# Altium PCB linkit-v4-0.3_6layers.PcbDoc (part 4 of 6)
Units mm, origin at the board's own origin, x right, y up, seen from the top; angles counter-clockwise.
Board outline 70 x 35 mm, 6 copper layers (Top Layer, Int1 (GND), Int2 (Sign), Int3 (Sign), Int4 (PWR), Bottom Layer), stack 1.551 mm thick; 185 components, 156 nets, 761 pads, 1071 vias.
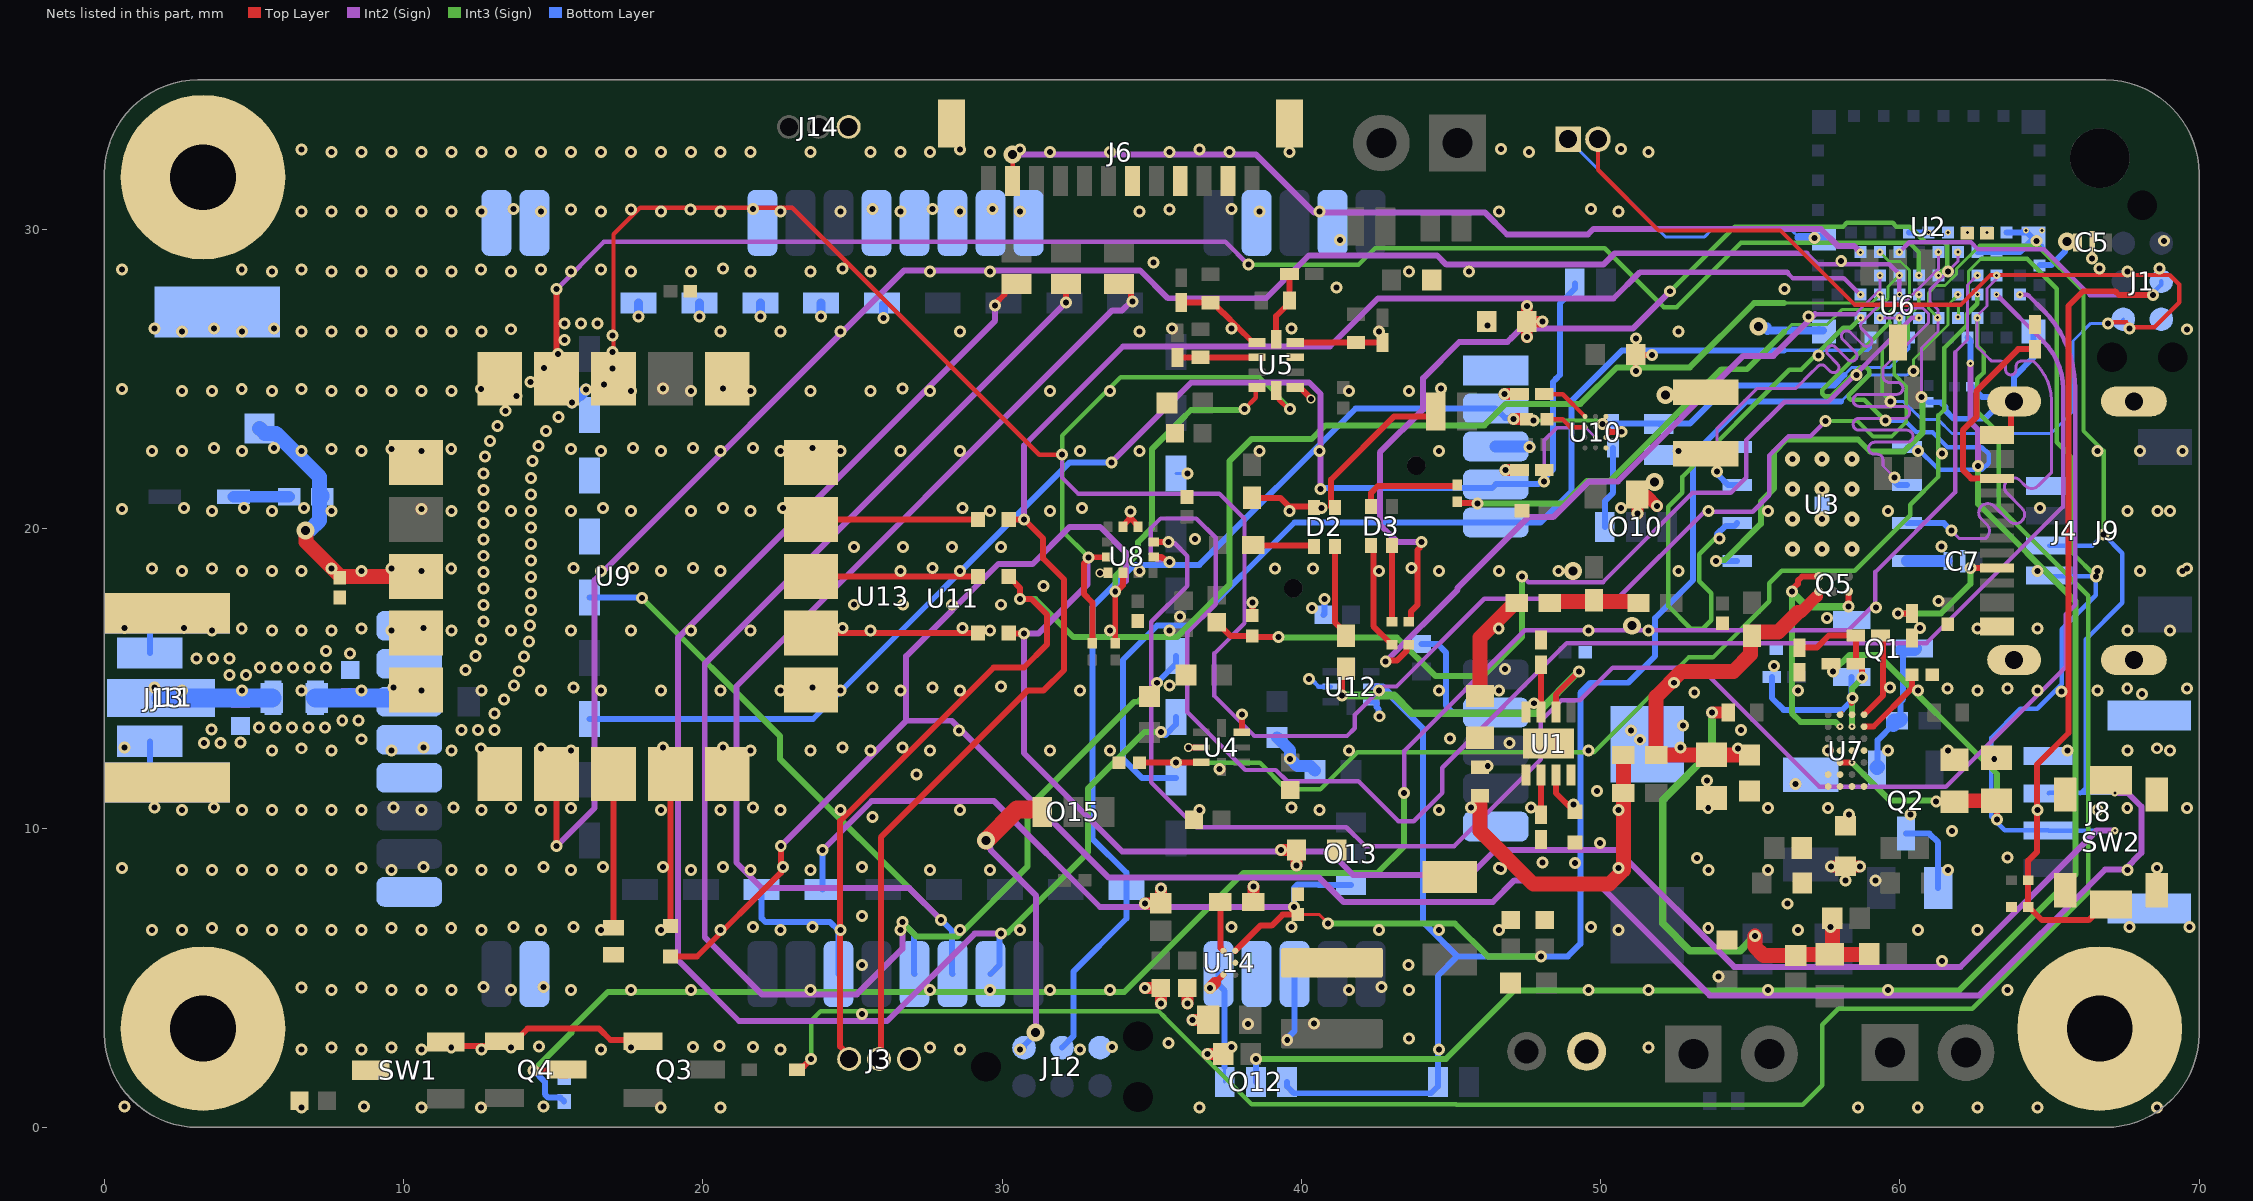
[diagram p7: the nets of this part, all layers, seen from the top]

## Via types
v1: diameter 0.4, hole 0.2, Top Layer to Int1 (GND), tented both sides, 275 vias
v2: diameter 0.4 (per signal layer), hole 0.2, Int1 (GND) to Int2 (Sign), tented both sides, 205 vias
v3: diameter 0.4, hole 0.2, Int1 (GND) to Bottom Layer, tented both sides, 147 vias
v4: diameter 0.4/0.4 (per signal layer), hole 0.2, Int1 (GND) to Int3 (Sign), tented both sides, 103 vias
v5: diameter 0.4, hole 0.2, Int3 (Sign) to Bottom Layer, tented both sides, 48 vias
v6: diameter 0.4, hole 0.2, Top Layer to Int3 (Sign), tented both sides, 46 vias
v7: diameter 0.6, hole 0.3, Top Layer to Int4 (PWR), tented both sides, 38 vias
v8: diameter 0.4/0.4/0.4/0.4 (per signal layer), hole 0.2, Top Layer to Bottom Layer, tented both sides, 33 vias
v9: diameter 0.4, hole 0.2, Int1 (GND) to Int2 (Sign), tented both sides, 23 vias
v10: diameter 0.4, hole 0.2, Int2 (Sign) to Bottom Layer, tented both sides, 20 vias
v11: diameter 0.6, hole 0.3, Int4 (PWR) to Bottom Layer, tented both sides, 19 vias
v12: diameter 0.25, hole 0.1, Int2 (Sign) to Bottom Layer, tented both sides, 17 vias
v13: diameter 0.4, hole 0.2, Top Layer to Int2 (Sign), tented both sides, 16 vias
v14: diameter 0.25, hole 0.1, Int3 (Sign) to Bottom Layer, tented both sides, 14 vias
v15: diameter 0.5, hole 0.2, Top Layer to Bottom Layer, tented both sides, 12 vias
v16: diameter 0.4, hole 0.2, Int2 (Sign) to Int3 (Sign), tented both sides, 10 vias
v17: diameter 0.25, hole 0.1, Top Layer to Bottom Layer, tented both sides, 7 vias
v18: diameter 0.6, hole 0.3, Top Layer to Bottom Layer, tented both sides, 6 vias
v19: diameter 0.4, hole 0.2, Top Layer to Bottom Layer, tented both sides, 5 vias
v20: diameter 0.2, hole 0.1, Int2 (Sign) to Bottom Layer, tented both sides, 5 vias
v21: diameter 0.226, hole 0.1, Top Layer to Int3 (Sign), tented both sides, 5 vias
v22: diameter 0.2, hole 0.1, Int1 (GND) to Bottom Layer, tented both sides, 4 vias
v23: diameter 0.6, hole 0.3, Int1 (GND) to Bottom Layer, tented both sides, 3 vias
v24: diameter 0.3, hole 0.2, Top Layer to Int1 (GND), tented both sides, 3 vias
v25: diameter 0.6, hole 0.3, Int3 (Sign) to Bottom Layer, tented both sides, 2 vias
v26: diameter 0.6, hole 0.3, Top Layer to Int1 (GND), tented both sides, 1 vias
v27: diameter 0.4, hole 0.2, Int4 (PWR) to Bottom Layer, tented both sides, 1 vias
v28: diameter 0.6, hole 0.3, Top Layer to Int2 (Sign), tented both sides, 1 vias
v29: diameter 0.25, hole 0.1, Int1 (GND) to Bottom Layer, tented both sides, 1 vias
v30: diameter 0.169, hole 0.1, Top Layer to Int2 (Sign), tented both sides, 1 vias

## Nets (pads, with @x,y where several pads share a name; then routed paths per layer and width w, separated by ;. In a path a pad name is that pad's centre, name@x,y a point inside that pad or via, vN(x,y) a via of type N, cw(c..) or ccw(c..) an arc to the next point about the centre after c; other vN are vias at no path point) (continued)
GND: BT1.- C1.2 C2.1 C3.1 C4.1 C5.3 C6.1 C7.3 C8.2 C9.1 C10.2 C11.1 C12.1 C13.2 C17.1 C18.1 C19.1 C20.2 C21.2 C22.2 C26.2 C27.2 C30.2 C31.2 C37.1 C38.1 C39.2 C40.1 C43.1 C44.2 C45.2 C46.1 C47.1 C49.1 C50.2 C58.2 FB1.2 FB2.2 FB3.2 FB4.2 FB5.2 J1.5 J2.1 J3.1 J4.A1_B12 J4.B1_A12 J4.SHIELD J5.2 J6.2 J6.4 J6.6 J6.13 J6.14 J8.4 J8.MP1 J8.MP2 J9.1 J11.1 J11.2 J12.5 J13.2 J14.1 MH2.1 MH3.1 MH4.1 O11.1 Q1.2 R6.2 R7.1 R8.1 R10.1 R11.1 R12.1 R18.1 R19.1 R20.1 R21.1 R22.1 R26.1 R33.1 R34.1 R37.2 R39.2 SW1.3 SW2.1 SW2.G1 SW2.G2 SW2.G3 SW2.G4 U1.4 U1.9 U2.1 U2.7 U2.14 U2.16 U2.18 U2.21 U2.23 U2.24 U2.25 U2.31 U3.4 U3.9 U4.3 U4.6 U5.1 U5.3 U6.2 U7.G2 U7.G3 U8.1 U8.8 U8.9 U9.1 U9.4 U9.5 U9.6 U9.10 U9.11 U9.15 U9.16 U9.20 U11.1@46.495,25.294 U11.3@46.495,22.754 U11.7@46.495,13.864 U11.10@46.495,10.054 U11.13@39.775,5.124 U11.14@38.505,5.124 U11.21@24.535,5.124 U11.24@14.375,5.124 U11.26@10.195,7.874 U11.29@10.195,11.684 U11.30@10.195,12.954 U11.32@10.195,15.494 U11.33@10.195,16.764 U11.34@13.105,30.224 U11.35@14.375,30.224 U11.36@21.995,30.224 U11.39@25.805,30.224 U11.42@29.615,30.224 U11.43@30.885,30.224 U11.45@38.505,30.224 U11.47@41.045,30.224 U12.3 U12.6 U13.6 U13.13 U13.14 U13.15 U13.16 U13.17 U13.19 U13.20 U13.21 U13.29 | length 54.1
  Top Layer w0.1: U7.G3@58.001,13.792 U7.G3@58.068,13.859
  Top Layer w0.192: U8.1@33.536,18.529 U8.1@33.54,18.529
  Top Layer w0.2: v24(33.274,18.529) U8.1@33.536,18.529 ; U8.9@34.04,20.079 34.04,20.104 34.252,20.316 34.252,20.536 v1(34.29,20.574) ; 34.328,20.316 34.54,20.104 U8.8@34.54,20.079 ; v24(36.223,12.7) U4.6@36.663,12.7 ; U4.3@38.013,13.2 U4.3@38.013,13.2 38.014,13.805 v1(38.016,13.806) ; R18.1@38.354,17.104 38.361,17.111 38.361,17.532 v1(38.367,17.539) ; U5.1@39.797,24.728 39.935,24.728 39.999,24.664 40.009,24.664 v24(40.327,24.345) ; v1@58.382,14.18 58.382,14.313 v1(58.42,14.351) ; J4.B1_A12@63.243,23.141 63.518,23.141 63.718,23.341 63.718,24.161 J4.SHIELD@63.818,24.261
  Top Layer w0.4: v1(57.692,8.727) FB2.2@58.175,8.727 v1(58.669,8.727)
  Bottom Layer w0.1: U13.13@25.986,27.547 U13.13@26.035,27.498 ; U13.6@35.814,21.844 v3(36.195,21.844) ; J2.1@48.911,33.02 52.17,29.761 53.477,29.761 53.689,29.972 56.387,29.972 56.626,29.733 ; U2.1@57.297,26.762 U2.1@57.46,26.599
  Bottom Layer w0.15: v5@40.366,14.938 40.572,14.732 U12.6@40.981,14.732
  Bottom Layer w0.2: J11.1@1.524,12.902 1.525,12.901 1.525,12.101 J13.2@2.1,11.526 ; J11.2@1.524,15.852 J11.2@1.524,15.852 1.525,16.601 J13.2@2.1,17.176 ; U13.29@21.967,7.947 21.967,6.989 22.098,6.858 24.257,6.858 24.535,6.58 U11.21@24.535,5.124 ; v3(39.529,2.927) 39.529,2.981 39.775,3.226 U11.13@39.775,5.124 ; C46.1@40.736,17.13 40.767,17.161 v3(40.767,17.653) ; U12.3@42.331,14.232 42.481,14.232 42.506,14.207 42.506,14.057 42.578,13.985 42.578,13.777 v3(42.616,13.739) ; C43.1@44.014,16.152 44.554,16.152 44.831,15.875 44.831,14.097 45.064,13.864 U11.7@46.495,13.864 ; U2.14@60.31,29.899 v22(60.96,29.899) ; C3.1@60.96,24.231 61.367,24.231 61.526,24.072 61.526,23.944 61.79,23.68 62.837,23.68 63.418,24.261 J4.SHIELD@63.818,24.261 ; C4.1@62.384,24.752 62.404,24.752 62.742,24.414 63.665,24.414 J4.SHIELD@63.818,24.261 ; U2.21@62.585,29.249 U2.23@63.235,29.249 64.01,29.249 U2.25@64.46,29.699 ; U2.24@63.56,29.899 64.26,29.899 U2.25@64.46,29.699 ; U2.31@64.46,26.599 64.46,25.725 63.818,25.083 J4.SHIELD@63.818,24.261 ; U2.25@64.73,29.429 U2.25@64.46,29.699
  Bottom Layer w0.254: 55.575,26.599 55.412,26.762 v23(55.276,26.762) v23@55.575,26.762 ; 55.575,26.628 U2.1@57.431,26.628
  Bottom Layer w0.3: v3(17.858,27.1) U13.17@17.858,27.547 ; v3(19.89,27.1) U13.16@19.89,27.547 ; v3(21.922,27.1) U13.15@21.922,27.547 ; v3(23.954,27.1) U13.14@23.954,27.547 ; v3(26.035,27.051) U13.13@26.035,27.498 ; 56.626,29.733 57.425,29.733 U2.7@57.46,29.699
  Bottom Layer w0.4: v3(15.638,24.216) 15.638,24.242 15.873,24.477 15.918,24.477 v3(16.105,24.665) ; C45.2@39.188,13.034 39.624,12.598 v3(39.624,12.319) 39.87,12.073 40.308,12.073 C44.2@40.458,11.923 ; U11.3@46.495,22.754 47.604,22.754 v5(47.625,22.733)
  other v1: 6.6,2.6 22.6,2.6 28.6,2.6 30.6,2.6 32.6,2.6 44.6,2.6 14.53,2.704 20.564,2.726 25.322,3.785 11.6,4.6 13.6,4.6 15.6,4.6 17.6,4.6 19.6,4.6 23.6,4.6 27.6,4.6 29.6,4.6 31.6,4.6 33.6,4.6 43.6,4.6 49.6,4.6 55.6,4.6 59.6,4.6 63.6,4.6 25.322,5.422 61.405,5.561 2.6,6.6 4.6,6.6 6.6,6.6 8.6,6.6 10.6,6.6 12.6,6.6 14.6,6.6 22.6,6.6 26.6,6.6 28.6,6.6 30.6,6.6 42.6,6.6 44.6,6.6 50.6,6.6 56.6,6.6 25.322,7.06 58.175,8.255 3.6,8.6 5.6,8.6 7.6,8.6 9.6,8.6 11.6,8.6 13.6,8.6 15.6,8.6 19.6,8.6 21.6,8.6 23.6,8.6 27.6,8.6 53.6,8.6 67.6,8.6 25.322,8.698 49.149,8.835 48.062,8.859 63.594,9.016 49.982,9.503 61.743,9.906 25.676,10.378 6.6,10.6 8.6,10.6 10.6,10.6 22.6,10.6 28.6,10.6 40.6,10.6 44.6,10.6 66.6,10.6 49.874,11.247 27.14,11.788 5.6,12.6 7.6,12.6 9.6,12.6 11.6,12.6 23.6,12.6 25.6,12.6 31.6,12.6 49.6,12.6 69.018,12.6 46.961,12.849 44.961,13 28.563,13.256 51.009,13.269 52.753,13.434 68.093,14.478 53.129,14.534 2.6,14.6 4.6,14.6 6.6,14.6 8.6,14.6 12.6,14.6 14.6,14.6 16.6,14.6 18.6,14.6 20.6,14.6 26.6,14.6 32.6,14.6 42.6,14.6 64.6,14.6 66.6,14.6 29.972,14.732 46.801,15.312 55.798,15.421 5.6,16.6 7.6,16.6 13.6,16.6 15.6,16.6 17.6,16.6 19.6,16.6 21.6,16.6 49.6,16.6 51.6,16.6 67.6,16.6 69.018,16.6 57.566,17.027 40.36,17.355 59.195,17.378 25.058,17.465 26.696,17.465 28.334,17.465 29.972,17.465 31.387,18.094 2.6,18.6 4.6,18.6 6.6,18.6 16.6,18.6 18.6,18.6 20.6,18.6 44.6,18.6 48.6,18.6 52.6,18.6 64.6,18.6 66.6,18.6 69.436,18.6 39.123,18.676 40.393,18.676 25.058,19.399 26.696,19.399 28.334,19.399 29.972,19.399 3.6,20.6 5.6,20.6 7.6,20.6 13.6,20.6 15.6,20.6 17.6,20.6 19.6,20.6 21.6,20.6 31.6,20.6 53.6,20.6 55.6,20.6 67.6,20.6 69.018,20.6 61.403,22.52 2.6,22.6 4.6,22.6 6.6,22.6 8.6,22.6 16.6,22.6 18.6,22.6 20.6,22.6 26.6,22.6 28.6,22.6 34.6,22.6 40.6,22.6 44.6,22.6 66.6,22.6 69.436,22.6 3.6,24.6 5.6,24.6 7.6,24.6 9.6,24.6 11.6,24.6 23.6,24.6 25.6,24.6 27.6,24.6 31.6,24.6 33.6,24.6 43.6,24.6 58.547,25.146 57.284,25.788 2.6,26.6 4.6,26.6 6.6,26.6 8.6,26.6 10.6,26.6 12.6,26.6 20.6,26.6 22.6,26.6 24.6,26.6 28.6,26.6 52.6,26.6 56.948,27.093 56.147,28.01 5.6,28.6 7.6,28.6 9.6,28.6 11.6,28.6 13.6,28.6 15.6,28.6 17.6,28.6 21.6,28.6 23.6,28.6 27.6,28.6 29.6,28.6 45.6,28.6 61.6,28.6 58.04,28.951 66.422,29.038 64.564,29.627 68.819,29.627 57.151,29.715 6.6,30.6 8.6,30.6 10.6,30.6 12.6,30.6 14.6,30.6 16.6,30.6 24.6,30.6 26.6,30.6 38.6,30.6 40.6,30.6 46.6,30.6 7.6,32.6 9.6,32.6 11.6,32.6 13.6,32.6 15.6,32.6 17.6,32.6 19.6,32.6 21.6,32.6 31.6,32.6 33.6,32.6 35.6,32.6 37.6,32.6 47.6,32.6
  other v2: 8.6,2.6 10.6,2.6 12.6,2.6 16.6,2.6 22.6,2.6 28.6,2.6 30.6,2.6 32.6,2.6 11.6,4.6 13.6,4.6 15.6,4.6 29.6,4.6 31.6,4.6 41.6,4.6 43.6,4.6 49.6,4.6 51.6,4.6 4.6,6.6 6.6,6.6 8.6,6.6 10.6,6.6 12.6,6.6 14.6,6.6 16.6,6.6 18.6,6.6 20.6,6.6 22.6,6.6 24.6,6.6 30.6,6.6 42.6,6.6 44.6,6.6 46.6,6.6 50.6,6.6 60.6,6.6 62.6,6.6 3.6,8.6 5.6,8.6 7.6,8.6 9.6,8.6 11.6,8.6 13.6,8.6 15.6,8.6 23.6,8.6 27.6,8.6 29.6,8.6 55.6,8.6 61.6,8.6 2.6,10.6 4.6,10.6 6.6,10.6 8.6,10.6 10.6,10.6 12.6,10.6 14.6,10.6 18.6,10.6 20.6,10.6 22.6,10.6 24.6,10.6 36.6,10.6 40.6,10.6 50.6,10.6 64.6,10.6 9.6,12.6 15.6,12.6 21.6,12.6 23.6,12.6 27.6,12.6 31.6,12.6 33.6,12.6 41.6,12.6 57.6,12.6 59.6,12.6 61.6,12.6 65.6,12.6 2.6,14.6 8.6,14.6 10.6,14.6 14.6,14.6 18.6,14.6 20.6,14.6 22.6,14.6 24.6,14.6 28.6,14.6 32.6,14.6 44.6,14.6 46.6,14.6 56.6,14.6 60.6,14.6 62.6,14.6 3.6,16.6 5.6,16.6 9.6,16.6 11.6,16.6 15.6,16.6 17.6,16.6 25.6,16.6 29.6,16.6 33.6,16.6 35.6,16.6 2.6,18.6 4.6,18.6 6.6,18.6 8.6,18.6 10.6,18.6 18.6,18.6 20.6,18.6 26.6,18.6 28.6,18.6 34.6,18.6 42.6,18.6 46.6,18.6 52.6,18.6 64.6,18.6 3.6,20.6 5.6,20.6 7.6,20.6 11.6,20.6 15.6,20.6 17.6,20.6 19.6,20.6 21.6,20.6 29.6,20.6 31.6,20.6 39.6,20.6 59.6,20.6 67.6,20.6 2.6,22.6 4.6,22.6 6.6,22.6 8.6,22.6 10.6,22.6 16.6,22.6 18.6,22.6 22.6,22.6 24.6,22.6 32.6,22.6 38.6,22.6 44.6,22.6 52.6,22.6 60.6,22.6 3.6,24.6 5.6,24.6 7.6,24.6 9.6,24.6 11.6,24.6 17.6,24.6 19.6,24.6 21.6,24.6 23.6,24.6 25.6,24.6 33.6,24.6 41.6,24.6 43.6,24.6 2.6,26.6 4.6,26.6 6.6,26.6 8.6,26.6 10.6,26.6 12.6,26.6 28.6,26.6 34.6,26.6 42.6,26.6 5.6,28.6 7.6,28.6 9.6,28.6 11.6,28.6 13.6,28.6 17.6,28.6 19.6,28.6 21.6,28.6 23.6,28.6 25.6,28.6 43.6,28.6 67.6,28.6 6.6,30.6 8.6,30.6 10.6,30.6 12.6,30.6 14.6,30.6 16.6,30.6 18.6,30.6 20.6,30.6 22.6,30.6 24.6,30.6 26.6,30.6 28.6,30.6 30.6,30.6 34.6,30.6 38.6,30.6 50.6,30.6 7.6,32.6 9.6,32.6 11.6,32.6 13.6,32.6 15.6,32.6 17.6,32.6 19.6,32.6 21.6,32.6 23.6,32.6 25.6,32.6 27.6,32.6 29.6,32.6 39.6,32.6 47.6,32.6 51.6,32.6
  other v3: 6.596,0.67 10.596,0.67 12.596,0.67 18.596,0.67 36.596,0.67 58.596,0.67 60.596,0.67 62.596,0.67 7.596,2.67 9.596,2.67 11.596,2.67 51.596,2.67 35.557,2.816 43.6,2.968 38.216,3.456 40.417,3.476 6.596,4.67 8.596,4.67 43.577,5.429 9.596,6.67 11.596,6.67 0.596,8.67 15.596,10.67 55.596,10.67 69.596,10.67 14.596,12.67 3.328,12.852 3.878,12.852 4.555,12.856 8.6,12.971 11.935,13.278 12.485,13.278 13.035,13.278 3.588,13.303 5.17,13.363 5.72,13.363 6.27,13.363 6.82,13.363 7.37,13.363 7.954,13.591 8.504,13.591 13.035,13.828 13.363,14.297 61.596,14.67 13.692,14.767 4.191,15.113 4.741,15.113 13.865,15.243 12.078,15.282 5.207,15.367 5.757,15.367 6.307,15.367 6.857,15.367 7.407,15.367 3.091,15.663 3.641,15.663 4.191,15.663 12.407,15.752 14.027,15.741 8.221,15.838 7.407,15.917 14.19,16.24 12.594,16.305 4.596,16.67 8.596,16.67 62.596,16.67 14.228,16.768 12.672,16.902 14.265,17.296 12.672,17.452 14.265,17.846 12.672,18.002 14.265,18.396 12.672,18.552 1.596,18.67 3.596,18.67 7.596,18.67 9.596,18.67 11.596,18.67 14.265,18.946 12.672,19.102 14.265,19.496 12.672,19.652 14.265,20.046 12.672,20.202 14.265,20.596 0.596,20.67 10.596,20.67 12.672,20.752 14.265,21.146 12.672,21.302 14.265,21.696 12.672,21.852 14.314,22.264 12.721,22.42 7.596,22.67 9.596,22.67 11.596,22.67 15.596,22.67 14.504,22.772 12.886,22.943 14.763,23.273 13.146,23.445 15.178,23.746 13.406,23.947 13.777,24.44 0.596,24.67 4.596,24.67 6.596,24.67 12.596,24.67 16.7,24.831 14.237,24.91 16.983,25.356 14.698,25.379 15.159,25.849 16.983,25.906 15.376,26.307 16.983,26.456 13.596,26.67 69.596,26.67 46.228,26.797 15.376,26.857 15.926,26.857 16.476,26.857 0.596,28.67 6.596,28.67 12.596,28.67 14.596,28.67 16.596,28.67 15.596,30.67 17.596,30.67 19.596,30.67 35.596,30.67 6.596,32.67 28.596,32.67
  other v4: 0.674,0.695 8.674,0.695 14.674,0.695 19.674,2.695 21.674,2.695 33.674,2.695 37.674,2.695 12.674,4.695 14.674,4.695 42.674,4.695 13.674,6.695 15.674,6.695 21.674,6.695 23.674,6.695 37.674,6.695 39.674,6.695 49.674,6.695 57.674,6.695 67.674,6.695 69.674,6.695 10.674,8.695 14.674,8.695 16.674,8.695 18.674,8.695 20.674,8.695 22.674,8.695 1.674,10.695 3.674,10.695 9.674,10.695 11.674,10.695 21.674,10.695 39.674,10.695 45.674,10.695 47.674,10.695 0.674,12.695 10.674,12.695 18.674,12.695 20.674,12.695 24.674,12.695 26.674,12.695 52.674,12.695 1.674,14.695 9.674,14.695 15.674,14.695 23.674,14.695 25.674,14.695 27.674,14.695 59.674,14.695 0.674,16.695 2.674,16.695 10.674,16.695 24.674,16.695 28.674,16.695 60.674,16.695 15.674,18.695 17.674,18.695 19.674,18.695 27.674,18.695 43.674,18.695 2.674,20.695 4.674,20.695 6.674,20.695 16.674,20.695 20.674,20.695 22.674,20.695 28.674,20.695 32.674,20.695 40.674,20.695 50.674,20.695 64.674,20.695 3.674,22.695 5.674,22.695 17.674,22.695 19.674,22.695 21.674,22.695 23.674,22.695 18.674,24.695 20.674,24.695 26.674,24.695 44.674,24.695 1.674,26.695 3.674,26.695 5.674,26.695 35.674,26.695 37.674,26.695 39.674,26.695 67.674,26.695 41.179,28.061 20.674,28.695 24.674,28.695 66.674,28.695 68.674,28.695 35.064,28.905 41.291,29.659 13.674,30.695 21.674,30.695 25.674,30.695 27.674,30.695 29.674,30.695 37.674,30.695 49.674,30.695 46.674,32.695 50.674,32.695
  other v5: 20.596,0.67 64.596,0.67 68.596,0.67 13.596,2.67 17.596,2.67 27.596,2.67 3.596,6.67 53.596,6.67 8.596,8.67 46.596,8.67 50.596,8.67 68.596,8.67 13.596,10.67 53.596,10.67 57.596,10.67 67.596,10.67 6.596,12.67 12.596,12.67 54.596,12.67 68.596,12.67 63.596,14.67 67.596,14.67 69.596,14.67 40.259,14.986 46.596,16.67 64.596,16.67 69.596,18.67 4.596,28.67 30.596,32.67 36.596,32.67
  other v6: 7.6,4.6 9.6,4.6 68.018,18.6 68.018,22.6
  other v8: 10.6,4.6 1.6,6.6 5.6,6.6 7.6,6.6 2.6,8.6 4.6,8.6 6.6,8.6 12.6,8.6 5.6,10.6 7.6,10.6 6.6,16.6 5.6,18.6 68.6,20.6 1.6,22.6 2.6,24.6 8.6,24.6 10.6,24.6 7.6,26.6 9.6,26.6 11.6,26.6 8.6,28.6 10.6,28.6 7.6,30.6 9.6,30.6 11.6,30.6 8.6,32.6 10.6,32.6 12.6,32.6 14.6,32.6 16.6,32.6 18.6,32.6 20.6,32.6 26.6,32.6
  other v9: 53.941,5.043 56.243,7.475 59.182,8.255 46.672,8.631 53.22,9.001 58.305,10.45 60.356,10.45 49.086,10.785 56.511,11.473 53.552,11.599 37.273,11.976 46.229,12.071 63.152,12.316 51.308,12.954 54.687,13.282 47.77,14.174 65.405,14.569 35.589,14.775 52.451,14.859 35.953,17.067 61.284,17.596 61.389,19.407 36.451,19.66
  other v15: 56.404,19.328 57.404,19.328 58.404,19.328 56.404,20.328 57.404,20.328 58.404,20.328 56.404,21.328 57.404,21.328 58.404,21.328 56.404,22.328 57.404,22.328 58.404,22.328
  other v19: 67.6,12.6
  other v22: 61.61,29.899 64.22,29.965 64.754,29.972
  other v23: 51.795,21.565 52.166,24.476
  other v25: 51.054,16.764 49.073,18.599
GPIO: J6.11 U2.9 | length 30.7
  Top Layer w0.146: v28(30.353,32.512) J6.11@30.354,31.623 J6.11@30.354,31.623
  Int2 (Sign) w0.2: v28(30.353,32.512) 38.481,32.512 40.416,30.577 46.131,30.577 46.873,29.835 49.572,29.835 49.756,30.02 57.356,30.02 57.92,29.456 58.465,29.456 v12(58.681,29.24)
GPS_INT: U2.61 U9.19 | length 52.3
  Top Layer w0.2: U9.19@15.118,25.015 v13(15.118,28.01)
  Int2 (Sign) w0.15: v13(15.118,28.01) 16.699,29.591 37.465,29.591 v16(38.227,28.829)
  Int3 (Sign) w0.15: v16(38.227,28.829) 41.91,28.829 42.462,29.381 50.135,29.381 51.795,27.721 52.105,27.411 52.543,27.411 53.633,28.501 54.691,29.558 60.322,29.558 60.635,29.246 v12(60.635,28.474)
GPS_NRST: U2.53 U9.18 | length 71.6
  Top Layer w0.146: U9.18@17.018,25.015 17.018,29.845 17.907,30.734 22.987,30.734 31.242,22.479 v13(32.004,22.479)
  Int2 (Sign) w0.146: v13(32.004,22.479) 32.004,21.717 32.541,21.18 37.256,21.18 38.1,20.335 38.1,16.846 37.095,15.84 37.095,14.417 38.432,13.079 41.527,13.079 41.783,13.335 41.783,13.783 42.732,14.732 43.18,14.732 46.11,17.662 50.555,17.662 53.467,20.574 55.08,20.574 55.633,21.127 55.633,22.452 56.276,23.095 57.009,23.095 v16(57.519,23.605)
  Int3 (Sign) w0.12: v16(57.519,23.605) 57.946,23.605 58.585,23.605 59.103,23.087 59.724,23.087 60.208,23.571 60.208,24.764 59.817,25.155 59.817,25.754 60.283,26.22 60.283,27.118 60.635,27.47 v14(60.635,27.824)
GPS_PPS: U2.54 U9.7 | length 62
  Top Layer w0.2: v13(15.113,9.398) 15.113,11.81 U9.7@15.118,11.815
  Int2 (Sign) w0.15: 56.876,29.21 57.24,28.846 59.645,28.846 59.985,28.507 v20(59.985,27.824)
  Int2 (Sign) w0.2: v13(15.113,9.398) 16.383,10.668 16.383,18.288 26.732,28.637 34.609,28.637 35.54,27.706 38.821,27.706 40.25,29.136 44.536,29.136 44.843,28.829 48.706,28.829 50.09,28.829 50.471,29.21 56.876,29.21
GPS_PWR_EN: R21.2 U2.50 U4.7 | length 39.4
  Top Layer w0.2: R21.2@34.589,12.192 v6(35.814,12.192) 35.818,12.196 36.659,12.196 U4.7@36.663,12.2
  Int3 (Sign) w0.15: v6(35.814,12.192) 38.608,12.192 39.497,11.303 40.64,11.303 41.868,12.531 49.765,12.531 52.938,15.704 53.755,15.704 55.638,17.587 55.638,18.187 56.05,18.599 58.494,18.599 60.346,20.451 60.346,20.805 61.289,21.749 61.289,23.789 61.489,23.989 61.489,26.052 62.235,26.798 62.235,27.175 62.585,27.525 v20(62.585,27.824)
GPS_UART_RX: J3.2 R40.2 U2.56 | length 55.1
  Top Layer w0.2: J3.2@25.892,2.286 25.951,2.345 25.951,9.695 30.861,14.605 31.392,14.605 32.069,15.282 32.069,18.315 31.369,19.014 31.369,19.685 v13(30.734,20.32) R40.2@30.226,20.32
  Int2 (Sign) w0.15: 56.22,28.575 56.413,28.382 58.127,28.382 v12(58.685,27.824)
  Int2 (Sign) w0.2: v13(30.734,20.32) 30.734,22.787 34.042,26.094 40.953,26.094 42.557,27.698 48.706,27.698 50.431,27.698 51.308,28.575 56.22,28.575
GPS_UART_TX: J3.3 R42.2 U2.55 | length 56.7
  Top Layer w0.2: J3.3@24.892,2.286 24.892,2.403 24.592,2.703 24.592,10.241 29.718,15.367 30.734,15.367 31.496,16.129 31.496,17.145 30.988,17.653 v6(30.607,17.653) 30.607,18.022 R42.2@30.335,18.294
  Int3 (Sign) w0.1: 56.134,27.549 59.06,27.549 v14(59.335,27.824)
  Int3 (Sign) w0.2: v6(30.607,17.653) 31.117,17.653 32.388,16.382 35.835,16.382 37.592,18.14 37.592,22.262 38.33,23 40.34,23 40.803,23.462 46.118,23.462 46.832,24.176 49.322,24.176 50.546,25.4 52.982,25.4 55.131,27.549 56.134,27.549
I2C_SCL: J8.2 J9.4 R1.1 R43.2 U2.37 U5.10 U8.12 | length 99.1
  Top Layer w0.15: R43.2@30.226,16.515 R43.2@30.231,16.51 ; v6(32.893,19.05) v6@32.895,19.052 ; U8.12@33.513,19.052 U8.12@33.515,19.054 ; U5.10@39.159,24.618 39.159,24.463 39.244,24.378 39.244,24.315 39.556,24.003 v6(39.624,24.003)
  Top Layer w0.2: R43.2@30.231,16.51 v13(30.734,16.51) ; v6(32.893,19.05) 32.893,18.996 32.734,18.836 32.734,17.828 33.02,17.542 R1.1@33.02,16.181 ; v6@32.895,19.052 U8.12@33.513,19.052
  Int2 (Sign) w0.2: v6(32.893,19.05) 32.849,19.006 32.849,18.135 31.224,16.51 v13(30.734,16.51) 30.734,12.504 34.016,9.222 40.943,9.222 41.73,8.435 45.646,8.435 46.482,9.271 50.558,9.271 54.462,5.368 62.025,5.368 66.574,9.916 v12(67.183,9.916)
  Int3 (Sign) w0.1: v20@61.954,27.093 61.954,27.419 62.285,27.749 62.285,28.598 62.71,29.023
  Int3 (Sign) w0.15: v6(32.893,19.05) 32.004,19.939 32.004,23.114 33.964,25.074 38.592,25.074 39.624,24.042 v6(39.624,24.003) ; v20(61.935,27.074) v20@61.954,27.093 ; 62.71,29.023 64.248,29.023 65.242,28.029 65.242,22.895 65.786,22.351 65.786,19.177 v5(66.548,18.415)
  Bottom Layer w0.15: J9.4@64.987,18.439 65.011,18.415 v5(66.548,18.415) 66.548,17.78 65.41,16.642 65.41,14.809 64.588,13.987 64.025,13.987 63.053,13.015 63.053,10.388 63.507,9.935 64.96,9.935 J8.2@64.979,9.916 v12(67.183,9.916)
I2C_SDA: J8.3 J9.3 R2.1 R44.1 U2.39 U5.9 U8.2 | length 116.9
  Top Layer w0.15: v6(38.1,24.003) 38.481,24.384 38.481,24.653 38.521,24.693 U5.9@38.521,24.728
  Top Layer w0.2: R44.1@18.918,5.71 19.807,5.71 22.606,8.509 v13(22.606,9.398) ; R2.1@33.782,16.181 v6(33.782,17.907) 33.83,17.907 34.04,18.117 U8.2@34.04,18.529
  Int2 (Sign) w0.2: v13(22.606,9.398) 26.797,13.589 ; v6(33.782,17.907) 33.782,17.91 34.134,18.262 34.134,19.206 33.274,20.066 32.258,20.066 31.02,18.828 29.877,18.828 26.797,15.748 26.797,13.589 ; v12(67.183,11.176) 67.616,11.176 68.069,10.722 68.069,9.174 67.507,8.612 66.854,8.612 62.655,4.413 53.643,4.413 49.801,8.255 47.117,8.255 46.403,7.541 41.403,7.541 40.595,8.348 33.562,8.348 28.321,13.589 26.797,13.589
  Int3 (Sign) w0.1: v14(61.261,27.06) 60.96,27.361 60.96,27.888 61.208,28.136 61.508,28.136 61.884,28.512 61.884,28.684 62.664,29.464
  Int3 (Sign) w0.15: 62.664,29.464 64.603,29.464 66.135,27.932 66.135,25.745 66.135,23.273 66.805,22.603 v5(66.805,19.816)
  Int3 (Sign) w0.2: v6(33.782,17.907) 33.782,18.415 34.548,19.181 34.548,19.562 35.006,20.02 35.006,22.662 35.988,23.644 36.315,23.971 38.068,23.971 v6(38.1,24.003)
  Bottom Layer w0.15: J8.3@64.979,11.166 64.989,11.176 66.04,11.176 ; J9.3@64.987,19.439 64.995,19.431 66.42,19.431 v5(66.805,19.816) 67.431,19.19 67.431,17.527 66.216,16.312 66.216,11.352 66.04,11.176 ; 66.03,11.166 66.04,11.176 ; v12(67.183,11.176) 66.04,11.176
IMU_PWR: R18.2 R31.1 U2.41 | length 31.2
  Top Layer w0.1: R18.2@38.354,16.424 R18.2@38.395,16.383
  Top Layer w0.2: R31.1@37.173,16.878 37.627,16.424 R18.2@38.354,16.424 ; R18.2@38.395,16.383 v6(39.243,16.383)
  Int2 (Sign) w0.15: v16(47.371,18.415) 47.393,18.415 47.584,18.224 50.08,18.224 53.056,21.2 54.347,21.2 54.864,21.717 54.864,22.97 56.147,24.253 57.601,24.253 60.397,27.049 v12(60.635,27.049)
  Int3 (Sign) w0.2: v6(39.243,16.383) 39.26,16.366 43.197,16.366 44.475,15.088 46.076,15.088 47.371,16.383 v16(47.371,18.415)
INT1_IMU: U2.49 U8.5 | length 54.5
  Top Layer w0.2: U8.5@35.065,19.054 35.321,19.054 v6(35.599,18.901)
  Int2 (Sign) w0.15: v6(35.599,18.901) 35.551,18.949 35.187,18.949 34.975,19.161 34.975,20.027 35.295,20.347 36.489,20.347 37.137,19.699 37.137,17.478 36.195,16.536 36.195,13.878 38.129,11.943 39.147,11.943 39.528,11.563 41.908,11.563 43.244,10.227 43.755,10.227 44.704,11.176 44.704,12.023 48.866,16.185 60.889,16.185 65.451,20.747 65.451,24.682 65.451,24.684 ccw(c63.22,24.684) 65.403,25.146 ccw(c63.22,24.684) 64.797,26.262 v20(63.235,27.824)
INT2_IMU: U2.29 U8.6 | length 60.7
  Top Layer w0.2: U8.6@35.065,19.554 v13(35.56,19.554)
  Int2 (Sign) w0.15: v13(35.56,19.554) 35.598,19.516 35.768,19.516 36.195,19.089 36.195,18.102 34.987,16.894 34.987,11.527 36.481,10.034 41.505,10.034 42.142,9.397 45.104,9.397 48.006,12.299 48.006,13.589 48.683,14.266 49.303,14.266 50.403,15.366 53.331,15.366 57.313,11.385 61.539,11.385 65.549,15.395 65.549,17.152 65.855,17.458 65.855,24.727 65.855,24.728 ccw(c62.201,24.727) 65.831,25.146 ccw(c62.201,24.727) 64.794,27.302 ; v12(64.01,27.824) 64.21,27.824 cw(c64.21,27.674) 64.316,27.78 64.793,27.302
KIM_I2C_SCL: U11.41@28.345,30.224
KIM_I2C_SDA: U11.40@27.075,30.224
KIM_PWR_ON: O12.2 U2.36 | length 50.1
  Int2 (Sign) w0.2: v12(62.357,25.527) 62.357,23.564 62.611,23.31 v16(62.611,22.098)
  Int3 (Sign) w0.2: v5(38.481,2.286) 44.831,2.286 47.124,4.579 61.983,4.579 65.859,8.455 65.859,17.587 62.611,20.835 v16(62.611,22.098)
  Bottom Layer w0.2: O12.2@38.481,1.524 v5(38.481,2.286) ; U2.36@62.26,26.399 62.357,26.302 v12(62.357,25.527)
KIM_RX: O2.1 U11.19@27.075,5.124 U13.3 | length 52.2
  Top Layer w0.2: v13(32.131,27.559) O2.1@32.131,28.181
  Int2 (Sign) w0.2: v10(26.67,6.858) 26.67,5.969 25.146,4.445 21.971,4.445 20.066,6.35 20.066,15.494 v13(32.131,27.559)
  Int3 (Sign) w0.2: v10(26.67,6.858) 27.151,6.377 28.511,6.377 30.858,8.724 30.858,10.665 34.417,14.224 34.544,14.224 v5(35.179,14.859)
  Bottom Layer w0.2: v10(26.67,6.858) 27.063,6.465 27.063,5.136 U11.19@27.075,5.124 ; v5(35.179,14.859) 35.179,14.863 35.814,15.498 U13.3@35.814,15.748
KIM_TX: O3.1 U11.18@28.345,5.124 U13.22 | length 51.6
  Top Layer w0.2: O3.1@33.909,28.181 34.079,28.181 34.309,27.951 34.309,27.705 34.363,27.651 v13(34.363,27.597)
  Int2 (Sign) w0.2: v10(27.965,6.931) 26.903,7.993 21.979,7.993 21.126,8.846 21.126,14.741 33.685,27.3 34.012,27.3 34.309,27.597 v13(34.363,27.597)
  Int3 (Sign) w0.2: v10(17.97,17.691) 22.578,13.083 22.578,12.318 v10(27.965,6.931)
  Bottom Layer w0.2: U13.22@16.214,17.714 17.947,17.714 v10(17.97,17.691) ; v10(27.965,6.931) 28.333,6.563 28.333,5.136 U11.18@28.345,5.124
LED_B: R24.1 U2.63 | length 23.3
  Top Layer w0.2: v13(42.82,15.569) 42.858,15.607 43.199,15.607 43.507,15.915 43.507,16.069 43.567,16.129 R24.1@43.587,16.129
  Int2 (Sign) w0.1: 58.516,27.178 59.335,27.997 v12(59.335,28.474)
  Int2 (Sign) w0.15: 57.17,27.178 58.516,27.178
  Int2 (Sign) w0.2: v13(42.82,15.569) 45.22,17.969 45.22,18.03 47.582,20.391 48.416,20.391 49.614,21.59 50.58,21.59 54.771,25.781 55.773,25.781 57.17,27.178
LED_G: R25.1 U2.60 | length 31.1
  Top Layer w0.2: R25.1@43.587,16.891 43.607,16.891 43.667,16.951 43.667,17.244 43.874,17.451 43.874,19.293 43.969,19.389 43.969,19.527 v13(44.008,19.565)
  Int2 (Sign) w0.2: v13(44.008,19.565) 43.203,19.565 42.622,20.146 42.622,22.556 44.069,24.003 44.069,25.036 45.276,26.243 46.885,26.243 47.026,26.384 47.026,26.388 47.327,26.689 48.706,26.689 51.073,26.689 v16(52.324,27.94)
  Int3 (Sign) w0.15: v16(52.324,27.94) 54.483,30.099 58.099,30.099 58.225,30.225 59.758,30.225 59.884,30.099 60.325,30.099 60.85,29.574 61.485,29.574 61.585,29.474 61.585,28.774 v14(61.285,28.474)
LED_R: R23.1 U2.62 | length 18.2
  Top Layer w0.2: R23.1@45.212,20.903 45.242,20.873 45.857,20.873 v6(45.887,20.842)
  Int3 (Sign) w0.1: 56.134,26.579 56.384,26.829 57.563,26.829 58.058,27.324 59.224,27.324 59.61,27.71 59.61,28.099 v14(59.985,28.474)
  Int3 (Sign) w0.2: v6(45.887,20.842) 48.782,20.842 49.539,21.599 50.301,21.599 54.036,25.334 54.889,25.334 56.134,26.579
LX1: L2.1 U10.A1
LX2: L2.2 U10.D1
NetBT1_+: BT1.+ C40.2 R41.1 U9.3 | length 9.3
  Top Layer w0.5: v18(6.731,19.939) 6.75,19.92 6.75,19.558 C40.2@7.874,18.434 ; C40.2@7.925,18.415 U9.3@10.418,18.415
  Bottom Layer w0.5: BT1.+@5.195,23.36 5.364,23.191 5.742,23.191 7.201,21.732 7.201,21.124 7.207,21.119 R41.1@7.286,21.119 ; v18(6.731,19.939) 6.75,19.958 6.867,19.958 7.191,20.282 7.191,21.024 7.241,21.074 R41.1@7.279,21.074
NetC2_2: C2.2 R53.1 U1.8 | length 3.7
  Top Layer w0.4: R53.1@47.127,17.526 R53.1@47.202,17.526
  Top Layer w0.5: C2.2@45.974,14.416 45.974,16.373 R53.1@47.127,17.526
NetC5_2: C5.2 U2.26 | length 1.4
  Bottom Layer w0.2: U2.26@64.66,28.799 64.683,28.822 65.069,28.822 65.51,29.263 65.51,29.527 v18(65.586,29.603)
NetC7_2: C7.2 U3.8 | length 1.4
  Bottom Layer w0.302: C7.2@61.554,18.923 C7.2@61.603,18.923
  Bottom Layer w0.4: U3.8@60.244,18.923 60.544,18.923 C7.2@61.554,18.923
NetC14_1: C14.1 R27.2 U5.4 | length 2.9
  Top Layer w0.2: U5.4@39.797,26.228 C14.1@41.829,26.228 R27.2@42.718,26.228
NetC15_1: C15.1 R30.2 U5.5 | length 2.5
  Top Layer w0.2: U5.5@39.159,26.338 39.159,27.113 39.604,27.558 C15.1@39.604,27.633 39.604,28.422 39.539,28.422 R30.2@39.639,28.522
NetC16_1: C16.1 R32.2 U5.6 | length 3.1
  Top Layer w0.2: R32.2@35.987,27.563 C16.1@36.967,27.563 37.042,27.563 37.395,27.21 37.403,27.21 37.868,26.744 38.334,26.278 38.471,26.278 U5.6@38.521,26.228
NetC23_1: C23.1 C24.2 C25.1 C28.2 C29.1 C32.2 C33.2 U7.B3 U7.B4 | length 17.4
  Top Layer w0.4: v6(53.721,13.862) C25.1@54.262,13.862 ; C33.2@58.911,5.78 C33.2@58.976,5.715
  Top Layer w0.5: v6(55.152,6.404) 55.152,6.039 55.445,5.746 C24.2@56.515,5.746 ; C24.2@56.549,5.78 C28.2@57.658,5.78 C33.2@58.911,5.78 ; C28.2@57.741,5.863 C32.2@57.741,6.987
  Int3 (Sign) w0.254: v6(53.721,13.862) 53.721,12.592 52.07,10.941 52.07,6.823 52.983,5.91 54.658,5.91 v6(55.152,6.404)
NetC30_1: C30.1 C31.1 R36.1 U7.C2 U7.C3 | length 15.6
  Top Layer w0.2: R36.1@57.697,15.494 57.757,15.434 v6(57.757,15.234) ; U7.C3@58.001,12.192 v21(58.401,12.192) ; v6(61.214,10.886) C31.1@61.83,10.886 C31.1@61.86,10.916 ; v6(63.246,10.287) C30.1@63.246,10.897
  Top Layer w0.5: C31.1@61.86,10.916 C30.1@63.227,10.916 C30.1@63.246,10.897
  Int3 (Sign) w0.2: v6(57.757,15.234) 58.318,15.794 59.263,15.794 63.246,11.811 v6(63.246,10.287) ; v21(58.401,12.192) 59.671,10.922 v6@61.214,10.922
NetC49_2: C49.2 J11.3 J13.1 L3.1@5.635,14.351 L3.2@5.6,14.351 | length 3.7
  Bottom Layer w0.642: J13.1@1.9,14.351 L3.2@5.6,14.351
NetC57_1: C57.1 R51.2 U5.7 | length 2.8
  Top Layer w0.2: R51.2@35.864,25.728 C57.1@36.626,25.728 U5.7@38.521,25.728 U5.7@38.519,25.73 ; C57.1@36.626,25.827 C57.1@36.723,25.73
NetC58_1: C58.1 R54.2 R56.2 U1.1 | length 10.7
  Top Layer w0.5: C58.1@45.974,10.993 45.974,9.906 47.752,8.128 50.292,8.128 50.758,8.594 R54.2@50.758,11.176 R56.2@50.758,12.446
NetD2_1: D2.1 O9.2 | length 5.5
  Top Layer w0.2: D2.1@41.117,20.716 41.094,20.739 40.99,20.739 40.99,21.647 43.092,23.749 44.32,23.749 O9.2@44.491,23.92
NetD2_2: D2.2 R13.1 | length 2.2
  Top Layer w0.2: R13.1@38.354,21.04 39.298,21.04 39.596,20.742 40.391,20.742 D2.2@40.417,20.716
NetD2_3: D2.3 R14.2 | length 2
  Top Layer w0.2: R14.2@38.396,19.457 38.411,19.442 40.391,19.442 D2.3@40.417,19.416
NetD2_4: D2.4 R15.1 | length 3.1
  Top Layer w0.2: D2.4@41.117,19.416 41.117,16.875 41.492,16.5 R15.1@41.492,16.425
NetD3_2: D3.2 R23.2 | length 3.5
  Top Layer w0.2: D3.2@42.322,20.742 42.322,21.196 42.563,21.437 45.186,21.437 R23.2@45.212,21.463
NetD3_3: D3.3 R24.2 | length 3.6
  Top Layer w0.2: D3.3@42.322,19.442 42.409,19.355 42.409,16.747 42.947,16.209 42.947,16.189 43.007,16.129 R24.2@43.027,16.129
NetD3_4: D3.4 R25.2 | length 2.5
  Top Layer w0.2: R25.2@43.027,16.891 D3.4@43.027,19.437
NetD4_1: D4.1 R41.2 | length 1.9
  Bottom Layer w0.4: D4.1@4.323,21.074 R41.2@6.179,21.074
NetJ4_A5: J4.A5 R34.2 | length 4.7
  Top Layer w0.2: v6(59.944,17.176) R34.2@60.401,17.176 ; v6(62.357,18.691) J4.A5@63.243,18.691
  Int3 (Sign) w0.2: v6(59.944,17.176) 61.372,17.176 62.357,18.161 v6(62.357,18.691)
NetJ4_B5: J4.B5 R33.2 | length 6.6
  Top Layer w0.192: 62.517,21.691 J4.B5@62.818,21.691
  Top Layer w0.2: 62.517,21.691 62.383,21.691 62.103,21.971 62.103,23.29 62.564,23.751 62.564,24.615 63.953,26.004 R33.2@64.516,26.004 ; J4.B5@62.818,21.691 J4.B5@63.243,21.691
NetJ12_1: J12.1 O15.1 | length 9.9
  Top Layer w0.6: v18(29.462,9.582) 30.5,10.62 O15.1@31.135,10.62
  Int2 (Sign) w0.2: v18(29.462,9.582) 29.462,9.474 29.608,9.328 29.608,9.279 31.132,7.756 31.132,3.192 v18(31.115,3.175)
  Bottom Layer w0.2: J12.1@30.734,2.667 30.734,2.73 31.115,3.111 v18(31.115,3.175)
NetL5_2: L5.2 U14.B1
NetO10_1: O10.1 R48.2 | length 2.8
  Bottom Layer w0.2: O10.1@50.14,20.066 50.14,20.93 50.419,21.209 R48.2@50.419,22.702
NetO12_1: O12.1 U11.15@37.235,5.124 | length 3.7
  Bottom Layer w0.1: O12.1@37.44,1.524 O12.1@37.44,2.011
  Bottom Layer w0.2: U11.15@37.235,5.124 37.235,4.771 37.44,4.567 O12.1@37.44,2.011
NetO13_1: O13.1 U13.30 | length 21.8
  Int2 (Sign) w0.2: v10(24.003,9.271) 25.637,10.905 29.735,10.905 33.274,7.366 v10(39.751,7.366)
  Bottom Layer w0.2: U13.30@23.999,7.947 24.003,7.951 v10(24.003,9.271) ; v10(39.751,7.366) 39.751,8.001 39.868,8.118 40.557,8.118 40.568,8.107 41.651,8.107 O13.1@41.656,8.103
NetQ1_1: Q1.1 R3.1 | length 4.4
  Bottom Layer w0.2: R3.1@55.722,15.047 55.722,14.351 56.117,13.956 58.08,13.956 58.386,14.262 Q1.1@58.386,15.047
NetQ1_3: Q1.3 Q2.1 R4.2 | length 4.8
  Bottom Layer w0.2: Q2.1@59.254,12.038 59.254,12.941 R4.2@59.777,13.464 ; R4.2@60.013,13.639 60.013,14.213 60.111,14.311 Q1.3@60.111,15.952
  Bottom Layer w0.5: Q2.1@59.238,12.022 Q2.1@59.254,12.038 ; R4.2@59.777,13.464 59.777,13.539 59.827,13.589 R4.2@59.902,13.589 59.963,13.589 R4.2@60.013,13.639 ; Q1.3@60.111,15.952 60.161,16.002 Q1.3@60.486,16.002
NetQ2_3: Q2.3 R5.1 | length 2.7
  Bottom Layer w0.2: Q2.3@60.201,9.819 60.984,9.819 61.277,9.526 R5.1@61.277,8.003
NetQ3_1: Q3.1 Q4.1 SW1.2 | length 7.1
  Top Layer w0.2: SW1.2@11.41,2.855 11.537,2.728 13.568,2.728 14.142,3.302 16.537,3.302 16.918,2.921 17.807,2.921 Q3.1@18,2.728
NetQ5_A2: Q5.A2 Q5.C1 U7.F3 | length 9.7
  Top Layer w0.2: v6(56.388,17.907) 56.388,17.961 56.591,18.164 56.591,18.27 56.733,18.411 Q5.C1@57.285,18.411 ; v6(58.285,17.399) Q5.A2@58.285,17.911
  Int3 (Sign) w0.2: v6(56.388,17.907) 56.388,17.892 56.388,13.843 56.678,13.553 57.84,13.553 v21(58.001,13.392)
  Int3 (Sign) w0.254: v6@56.388,17.892 56.881,17.399 v6(58.285,17.399)
NetR10_2: R10.2 U1.3 | length 1.5
  Top Layer w0.2: U1.3@48.51,11.777 48.51,11.172 49.137,10.546 R10.2@49.149,10.546
NetR11_2: R11.2 U1.2 | length 1.3
  Top Layer w0.2: R11.2@48.01,10.445 U1.2@48.01,11.777
NetR12_2: R12.2 U1.7 | length 1.6
  Top Layer w0.2: R12.2@48.006,15.463 48.008,15.461 48.008,13.879 U1.7@48.01,13.877
NetR17_1: R17.1 U2.20
  other v17: 62.26,29.899
NetR17_2: R17.2 U2.22
  other v17: 62.91,29.899
NetR36_2: R36.2 R38.1 R39.1 U7.F2 | length 5.4
  Top Layer w0.2: R39.1@56.642,16.033 57.223,16.033 57.63,16.44 R38.1@58.525,16.44 R36.2@58.525,15.498 ; R36.2@58.521,15.494 58.633,15.494 58.733,15.394 58.733,15.039 v6(58.741,15.031)
  Int3 (Sign) w0.2: v21(58.401,13.392) 58.401,14.664 58.741,15.005 v6(58.741,15.031)
NetR37_1: R37.1 U7.F1 | length 2.6
  Top Layer w0.2: U7.F1@58.801,13.392 58.806,13.397 59.117,13.397 60.401,14.681 R37.1@60.401,15.132
NetR38_2: R38.2 U7.G1 | length 2.9
  Top Layer w0.2: U7.G1@58.801,13.792 59.436,14.427 59.436,16.353 R38.2@59.349,16.44
NetR40_1: R40.1 U9.14 | length 5.6
  Top Layer w0.2: U9.14@23.618,20.315 23.623,20.32 R40.1@29.201,20.32
NetR42_1: R42.1 U9.13 | length 5.6
  Top Layer w0.2: U9.13@23.618,18.415 R42.1@29.201,18.415
NetR43_1: R43.1 U9.12 | length 5.6
  Top Layer w0.2: U9.12@23.618,16.515 R43.1@29.201,16.515
NetR44_2: R44.2 U9.9 | length 5.1
  Top Layer w0.2: R44.2@18.918,6.736 U9.9@18.918,11.815
NetR45_1: R45.1 U10.B2 | length 3.8
  Top Layer w0.2: v13(48.11,21.58) 48.11,21.96 R45.1@48.112,21.962
  Int2 (Sign) w0.1: 49.512,23.373 v30(49.828,23.057)
  Int2 (Sign) w0.12: v13(48.11,21.58) 48.11,22.953 48.53,23.373 49.512,23.373
NetR46_1: R46.1 U10.C3 | length 1.4
  Top Layer w0.15: R46.1@48.205,23.665 48.209,23.661 48.729,23.661 48.986,23.404 U10.C3@49.471,23.404
NetR47_2: R47.2 U10.D3 | length 1.7
  Top Layer w0.15: R47.2@48.112,24.502 48.733,24.502 U10.D3@49.478,23.757
NetR50_1: R50.1 U14.C2 | length 1.9
  Top Layer w0.2: U14.C2@37.338,5.966 37.296,6.008 ; U14.C2@37.392,5.903 37.296,6 37.296,6.008 ; R50.1@37.392,7.439 R50.1@37.296,7.535 37.296,6.008
NetR52_1: R52.1 R53.2 R55.1 | length 3
  Top Layer w0.4: R53.2@48.302,17.526 R53.2@48.344,17.569 ; R55.1@49.741,17.569 R55.1@49.784,17.611 R55.1@49.827,17.569 ; R52.1@51.224,17.569 R52.1@51.266,17.526
  Top Layer w0.5: R53.2@48.344,17.569 R55.1@49.741,17.569 ; R55.1@49.827,17.569 R52.1@51.224,17.569
NPG_LED: R15.2 U1.6 | length 11.4
  Top Layer w0.2: v6(41.365,14.434) 41.365,15.198 R15.2@41.492,15.325 ; U1.6@48.51,13.877 48.51,14.474 v6(49.276,15.24)
  Int3 (Sign) w0.254: v6(41.365,14.434) 43.097,14.434 43.688,13.843 47.879,13.843 v6(49.276,15.24)
nRESET: C6.2 J1.3 R16.1 SW2.2 U2.13 | length 36.8
  Top Layer w0.2: C6.2@64.288,7.366 R16.1@64.288,8.255 64.288,8.916 64.573,9.201 64.573,12.122 65.631,13.18 65.631,27.454 66.118,27.94 67.195,27.94 67.322,27.813 v19(68.453,27.813) ; C6.2@64.308,7.366 64.746,6.928 66.309,6.928 66.831,7.45 SW2.2@67.056,7.45
  Int2 (Sign) w0.15: v12(59.985,29.249) 60.309,29.573 62.375,29.573 62.611,29.337 64.827,29.337 66.351,27.813 v19(68.453,27.813)
  Bottom Layer w0.15: v19(68.453,27.813) 68.453,27.881 68.736,28.164 J1.3@68.736,28.276
nRESET-SAT: J12.3 O11.2 R48.1 U2.42 U11.2@46.495,24.024 U13.35 | length 47.8
  Int3 (Sign) w0.146: v5(47.752,23.622) 49.883,23.622 49.993,23.512 v5(50.062,23.512)
  Bottom Layer w0.1: 58.149,25.146 58.402,25.399 59.669,25.399 60.31,26.04 U2.42@60.31,26.399
  Bottom Layer w0.2: J12.3@32.004,2.667 32.385,3.048 32.385,5.207 34.159,6.981 U13.35@34.159,7.947 34.159,8.513 33.02,9.652 33.02,17.399 34.419,18.798 36.59,18.798 41.816,24.024 U11.2@46.495,24.024 46.813,23.706 47.599,23.706 47.683,23.622 v5(47.752,23.622) ; v5(50.062,23.512) 50.405,23.512 R48.1@50.419,23.526 50.419,23.516 51.935,23.516 O11.2@51.943,23.508 51.951,23.516 52.98,23.516 54.261,24.797 57.8,24.797 58.149,25.146
NRF_DBG: J1.6 J2.2 U2.43 | length 40.6
  Top Layer w0.146: J2.2@49.911,33.02 49.911,31.999 51.938,29.972 56.007,29.972 58.485,27.494 62.038,27.494 63.025,28.481 69.019,28.481 69.335,28.166 69.335,27.567 68.505,26.737 67.733,26.737 67.571,26.9 66.988,26.9 v19(66.947,26.858)
  Int3 (Sign) w0.12: v5(59.69,24.257) 59.412,24.535 59.412,26.002 59.985,26.575 v14(59.985,27.049)
  Bottom Layer w0.1: v5(59.69,24.257) 60.112,24.257 60.328,24.041 60.347,24.041 60.729,23.66 61.268,23.66 61.742,23.185 65.051,23.185 65.786,23.92 65.786,26.275 66.38,26.87 66.935,26.87 v19(66.947,26.858) 67.004,26.916 67.375,26.916 J1.6@67.466,27.006
PGND1: C41.2 C42.2 FB4.1 R45.2 R46.2 R47.1 U10.B1 U10.C1 | length 6.6
  Top Layer w0.1: U10.B1@50.178,23.057 50.341,23.22 ; U10.C1@50.178,23.407 50.215,23.407 50.341,23.282
  Top Layer w0.195: v1(51.181,25.273) 51.174,25.28 C42.2@51.174,25.82 ; v1(51.181,26.363) 51.181,25.827 C42.2@51.174,25.82 ; v1(51.711,25.808) 51.186,25.808 C42.2@51.174,25.82
  Top Layer w0.2: 50.341,23.243 v1@50.699,23.243
  Top Layer w0.385: v1(47.538,26.406) FB4.1@47.538,26.829 ; FB4.1@47.538,27.019 v1(47.538,27.442) ; FB4.1@47.633,26.924 v1(48.056,26.924)
  Top Layer w0.4: v1(46.793,24.501) v1(46.793,24.501) R47.1@47.288,24.502 ; v1(46.825,21.962) R45.2@47.288,21.962 ; v1(47.083,23.665) R46.2@47.525,23.665 ; v1(51.23,20.518) C41.2@51.23,21.153 51.265,21.118 51.532,21.118 v1(51.882,20.768)
  other v1: 50.702,23.246
PGND2: C51.2 C52.1 C53.1 C54.1 C55.1 FB3.1 R50.2 U14.A2 | length 5.8
  Top Layer w0.2: 37.118,4.829 U14.A2@37.392,5.103
  Top Layer w0.4: v1(34.782,4.662) C55.1@35.306,4.662 v1(35.306,4.138) ; v1(34.782,7.487) C53.1@35.306,7.487 v1(35.306,7.99) ; v1(36.195,4.138) C54.1@36.195,4.662 ; v1(36.368,3.598) C51.2@36.892,3.598 ; v1(36.862,2.455) C52.1@37.386,2.455 ; v1(36.951,4.662) 37.118,4.829 ; R50.2@38.396,7.535 v1(38.396,8.059) ; v1(39.314,9.271) FB3.1@39.838,9.271 v1(39.838,8.747)
PGND3: FB2.1 U7.A1 U7.A2 U7.A3 U7.A4
POWER_CONTROL: D1.2 U2.35 | length 71
  Top Layer w0.2: D1.2@23.152,1.93 23.262,2.04 23.376,2.04 v6(23.622,2.286)
  Int3 (Sign) w0.15: v6(23.622,2.286) 23.622,3.567 23.944,3.889 35.227,3.889 35.439,3.677 38.337,0.778 45.168,0.778 45.184,0.762 56.753,0.762 57.404,1.413 57.404,3.429 57.945,3.97 62.42,3.97 66.288,7.838 66.288,17.765 63.305,20.748 63.305,23.202 62.589,23.918 62.589,25.013 62.799,25.222 62.799,25.745 62.799,25.894 62.585,26.107 v14(62.585,27.049)
QSPI_CLK: U2.45 U3.6 | length 17.6
  Int2 (Sign) w0.1: v12(59.335,27.049) 59.842,27.049 60.092,27.299 60.273,27.299 60.348,27.374 60.77,27.374 60.96,27.183 60.96,26.897 59.436,25.373 59.436,25.146 59.436,25.096 ccw(c59.636,25.096) 59.636,24.896 59.898,24.896 cw(c59.898,24.696) 59.898,24.496 58.636,24.496 ccw(c58.636,24.296) 58.636,24.096 60.129,24.096 cw(c60.129,23.896) 60.129,23.696 58.636,23.696 ccw(c58.636,23.496) 58.636,23.296 60.236,23.296 cw(c60.236,23.096) 60.236,22.896 59.158,22.896 ccw(c59.158,22.696) 59.158,22.496 59.236,22.496 cw(c59.236,22.296) 59.436,22.296 59.436,22.098 59.568,21.966 v10(59.817,21.717)
  Bottom Layer w0.2: v10(59.817,21.717) 59.844,21.69 59.844,21.563 59.944,21.463 U3.6@60.244,21.463
QSPI_CS: U2.19 U3.1 | length 17.7
  Int2 (Sign) w0.1: v16(60.722,24.405) 60.722,26.046 61.27,26.594 61.27,27.323 61.01,27.583 61.01,28.008 61.935,28.933 v12(61.935,29.249)
  Int3 (Sign) w0.2: v10(53.848,18.923) 53.886,18.961 54.148,18.961 55.356,20.17 55.356,20.911 55.8,21.355 55.8,22.578 56.209,22.987 58.599,22.987 59.002,22.584 60.129,22.584 60.761,23.216 60.761,24.366 v16(60.722,24.405)
  Bottom Layer w0.2: v10(53.848,18.923) U3.1@54.564,18.923
QSPI_IO0: U2.11 U3.5 | length 18.8
  Int3 (Sign) w0.1: v14(59.335,29.249) 59.647,28.937 60.021,28.937 60.32,28.638 60.32,27.684 60.101,27.465 59.879,27.465 59.653,27.239 59.653,26.89
  Int3 (Sign) w0.15: v5@59.513,23.614 58.812,24.315 58.362,24.315 58.295,24.382 58.295,24.465 58.976,25.146 58.976,25.299 58.875,25.4 58.674,25.4 57.703,24.429 57.486,24.429 57.404,24.511 57.404,24.641 59.653,26.89
  Bottom Layer w0.15: v5(59.524,23.614) 60.171,23.614 60.552,23.233 61.091,23.233 61.591,22.733 62.738,22.733 62.963,22.508 62.963,22.196 62.738,21.971 61.306,21.971 60.544,22.733 U3.5@60.244,22.733
QSPI_IO1: U2.47 U3.2 | length 18.7
  Int3 (Sign) w0.15: v10@53.848,19.685 53.826,19.685 53.294,19.152 53.294,18.249 53.692,17.851 53.692,16.947 53.411,16.666 53.015,16.666 52.259,17.421 52.259,20.741 52.724,21.206 52.724,21.736 56.302,25.314 56.698,25.314 58.108,26.724 58.36,26.724 v14(58.685,27.049)
  Bottom Layer w0.2: v10@53.848,19.685 53.886,19.723 53.886,19.815 54.175,20.104 54.475,20.104 U3.2@54.564,20.193
  other v10: 53.975,19.685
QSPI_IO2: U2.17 U3.3 | length 16.5
  Int2 (Sign) w0.1: v10(53.884,21.917) 53.884,23.346 55.235,24.697 56.523,24.697 56.619,24.792 56.973,25.146 57.255,25.429 cw(c57.379,25.305) 57.503,25.429 57.662,25.27 ccw(c57.786,25.393) 57.91,25.27 ccw(c57.786,25.393) 57.91,25.517 57.604,25.823 cw(c57.727,25.947) 57.604,26.071 cw(c57.727,25.947) 57.851,26.071 58.269,25.653 ccw(c58.393,25.776) 58.517,25.653 ccw(c58.393,25.776) 58.517,25.9 58.099,26.318 cw(c58.222,26.442) 58.099,26.566 cw(c58.222,26.442) 58.346,26.566 58.764,26.148 ccw(c58.888,26.271) 59.012,26.148 ccw(c58.888,26.271) 59.012,26.395 58.74,26.666 cw(c58.864,26.79) 58.74,26.914 59.375,27.549 60.147,27.549 61.285,28.686 v12(61.285,29.249)
  Bottom Layer w0.2: v10(53.884,21.917) 53.922,21.879 53.922,21.805 54.264,21.463 U3.3@54.564,21.463
QSPI_IO3: U2.57 U3.7 | length 18.5
  Int2 (Sign) w0.1: v10(61.722,19.939) 61.976,19.685 62.865,19.685 62.9,19.72 ccw(c62.685,19.935) 62.9,20.15 62.723,20.327 cw(c62.938,20.542) 62.723,20.757 cw(c62.938,20.542) 63.153,20.757 63.647,20.263 ccw(c63.862,20.478) 64.077,20.263 ccw(c63.862,20.478) 64.077,20.693 63.583,21.187 cw(c63.798,21.402) 63.583,21.617 cw(c63.798,21.402) 64.013,21.617 64.19,21.44 ccw(c64.405,21.655) 64.62,21.44 65.072,21.892 65.072,24.302 ccw(c63.173,24.211) 64.829,25.146 ccw(c63.173,24.211) 64.605,25.461 64.463,25.604 64.104,25.604 64.054,25.604 ccw(c64.054,25.429) 63.879,25.429 63.879,25.321 cw(c63.704,25.321) 63.704,25.146 cw(c63.704,25.321) 63.529,25.321 63.529,25.429 ccw(c63.354,25.429) 63.354,25.604 63.066,25.604 62.891,25.779 62.575,26.094 62.575,27.113 62.911,27.448 62.911,28.034 63.206,28.33 63.206,28.445 v12(63.235,28.474)
  Bottom Layer w0.2: U3.7@60.244,20.193 61.468,20.193 v10(61.722,19.939)
REED_MCU: Q4.3 R7.2 U2.58 | length 68.5
  Top Layer w0.2: v19(14.351,1.905) 15.082,1.905 15.246,1.741 Q4.3@15.47,1.741
  Int2 (Sign) w0.1: 61.841,25.9 62.26,26.319 62.26,28.149 v12(62.585,28.474)
  Int2 (Sign) w0.15: v16(43.434,11.176) 43.434,12.579 47.469,16.614 58.283,16.614 59.182,17.513 59.182,18.561 61.841,21.22 61.841,25.745 61.841,25.9
  Int3 (Sign) w0.2: v19(14.351,1.905) 15.608,3.162 15.608,3.308 16.826,4.526 34.083,4.526 38.066,8.509 42.545,8.509 43.434,9.398 v16(43.434,11.176)
  Bottom Layer w0.2: v19(14.351,1.905) 14.725,1.531 14.725,1.111 14.842,0.994 15.243,0.994 R7.2@15.367,0.87
RX-OUT: C26.1 C27.1 Q5.C2 R35.2 R56.1 U7.D1 U7.D2 U7.D3 U7.D4 | length 12.2
  Top Layer w0.4: 56.587,17.203 56.68,17.203 57.222,17.746
  Top Layer w0.5: C27.1@54.972,12.446 54.969,12.449 53.705,12.449 C26.1@53.702,12.452 53.699,12.449 51.861,12.449 R56.1@51.858,12.446 51.858,14.393 52.705,15.24 54.444,15.24 55.011,15.807 55.011,16.376 R35.2@55.061,16.426 55.061,16.501 55.111,16.551 55.935,16.551 56.587,17.203
SAFE: R26.2 U9.8 | length 5.1
  Top Layer w0.2: R26.2@17.018,6.673 U9.8@17.018,11.815
SAT_ANTENNA: C47.2 L3.1@7.1,14.351 L3.2@7.065,14.351 L4.1 U11.31@10.195,14.224 | length 3.7
  Bottom Layer w0.642: L3.2@7.065,14.351 L3.1@7.1,14.351 8.204,14.351 C47.2@8.221,14.368 ; C47.2@8.255,14.351 10.626,14.351 10.68,14.297 L4.1@10.68,14.224
SAT_EN: O12.3 O14.2 R20.2 U2.51 U12.2 U14.C1 | length 66.4
  Top Layer w0.1: R20.2@39.878,7.112 40.6,7.112 v6(40.898,6.814)
  Top Layer w0.2: U14.C1@37.792,5.903 38.631,6.742 39.008,6.742 39.378,7.112 R20.2@39.878,7.112
  Int3 (Sign) w0.1: v5(60.452,25.273) 60.452,25.66 61.604,26.811 61.604,27.478 61.935,27.81 v14(61.935,27.824)
  Int3 (Sign) w0.2: v6(40.898,6.814) 45.129,6.814 46.228,5.715 v5(48.006,5.715)
  Bottom Layer w0.1: 58.032,24.257 58.918,25.143 60.243,25.143 v5@60.373,25.273
  Bottom Layer w0.2: O12.3@39.522,1.524 39.522,1.373 39.753,1.143 44.334,1.143 44.564,1.373 O14.2@44.564,1.524 44.564,5.067 45.212,5.715 ; U12.2@42.331,14.732 42.732,14.732 42.96,14.504 42.96,14.433 44.069,13.324 44.069,6.858 45.212,5.715 ; 58.032,24.257 54.864,24.257 53.086,22.479 53.086,18.288 51.816,17.018 51.816,15.748 50.927,14.859 49.657,14.859 49.322,14.524 49.322,6.134 48.903,5.715 v5(48.006,5.715) 45.212,5.715 ; v5@60.373,25.273 v5(60.452,25.273)
SAT_INT: U2.46 U11.5@46.495,20.214 U13.1 | length 36.8
  Bottom Layer w0.12: 56.134,25.968 58.924,25.968 59.01,26.054 U2.46@59.01,26.399
  Bottom Layer w0.2: U13.1@35.814,11.684 34.671,11.684 34.036,12.319 34.036,15.621 35.179,16.764 36.322,16.764 39.772,20.214 47.75,20.214 47.755,20.208 47.986,20.208 49.022,21.244 49.022,24.271 50.719,25.968 56.134,25.968
SAT_SPI_MISO: O4.1 U11.17@29.615,5.124 U13.2 | length 52
  Top Layer w0.2: v13(29.772,27.469) 29.772,27.523 30.08,27.831 30.08,27.951 30.31,28.181 O4.1@30.48,28.181
  Int2 (Sign) w0.2: v13(29.772,27.469) 29.772,26.961 19.177,16.366 19.177,5.588 21.209,3.556 26.162,3.556 29.083,6.477 v10(29.972,6.477)
  Int3 (Sign) w0.2: v10(29.972,6.477) 30.01,6.515 30.192,6.515 32.877,9.2 32.877,11.33 34.754,13.208 v5(35.306,13.208)
  Bottom Layer w0.2: U11.17@29.615,5.124 29.922,5.431 29.922,6.373 29.972,6.423 v10(29.972,6.477) ; v5(35.306,13.208) 35.36,13.208 35.452,13.116 35.464,13.116 35.814,13.466 U13.2@35.814,13.716
SAT_SPI_NSS: O1.1 U11.4@46.495,21.484 U13.24 | length 47
  Int2 (Sign) w0.2: v10(33.655,22.225) 36.322,24.892 40.259,24.892 40.64,24.511 v10(40.64,21.336)
  Bottom Layer w0.146: 48.5,25.003 48.514,25.017 48.514,25.019
  Bottom Layer w0.2: U13.24@16.214,13.65 23.683,13.65 32.258,22.225 v10(33.655,22.225) ; v10(40.64,21.336) 40.663,21.359 46.37,21.359 U11.4@46.495,21.484 ; U11.4@46.505,21.494 47.919,21.494 48.407,21.982 48.407,24.91 48.5,25.003 ; 48.514,25.019 48.641,25.146 48.641,25.4 48.641,27.529 49.136,28.024 O1.1@49.136,28.194